# Altium PCB MKIPRIMARY 2L.PcbDoc
Units mm, origin at the board's own origin, x right, y up, seen from the top; angles counter-clockwise.
Board outline 61.2 x 34.4 mm, 4 copper layers (Top Layer, Int1, Int2, Bottom Layer), stack 1.586 mm thick; 137 components, 1 nets, 284 pads, 96 vias.
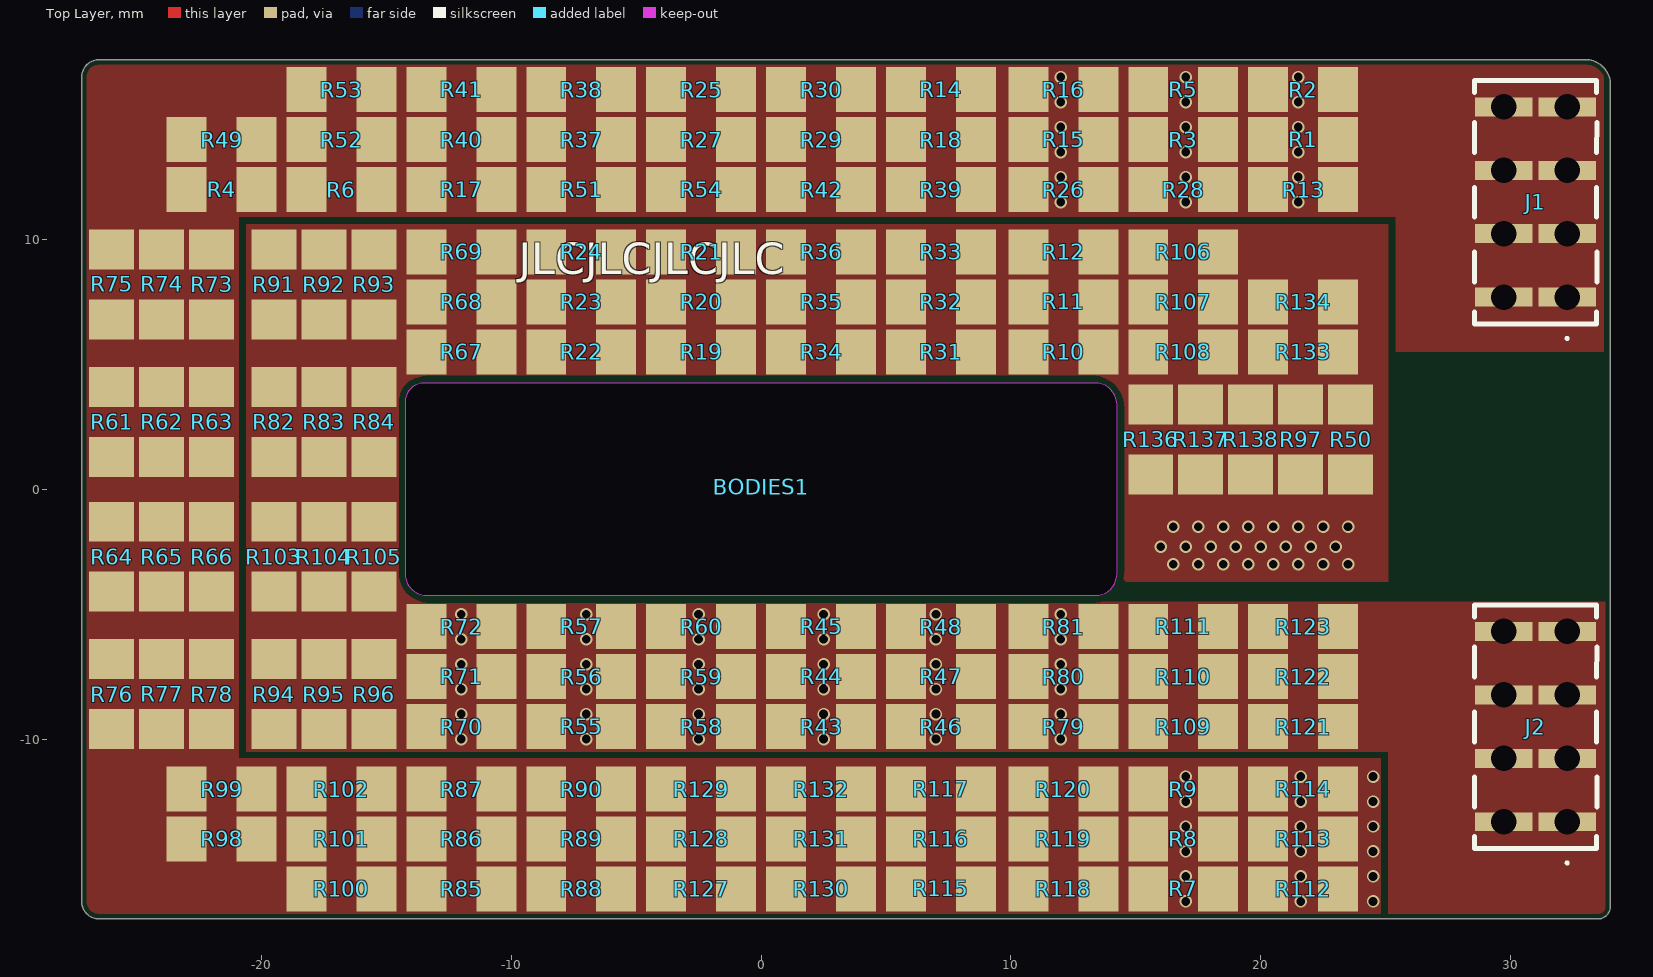
[diagram p0: Top Layer view]
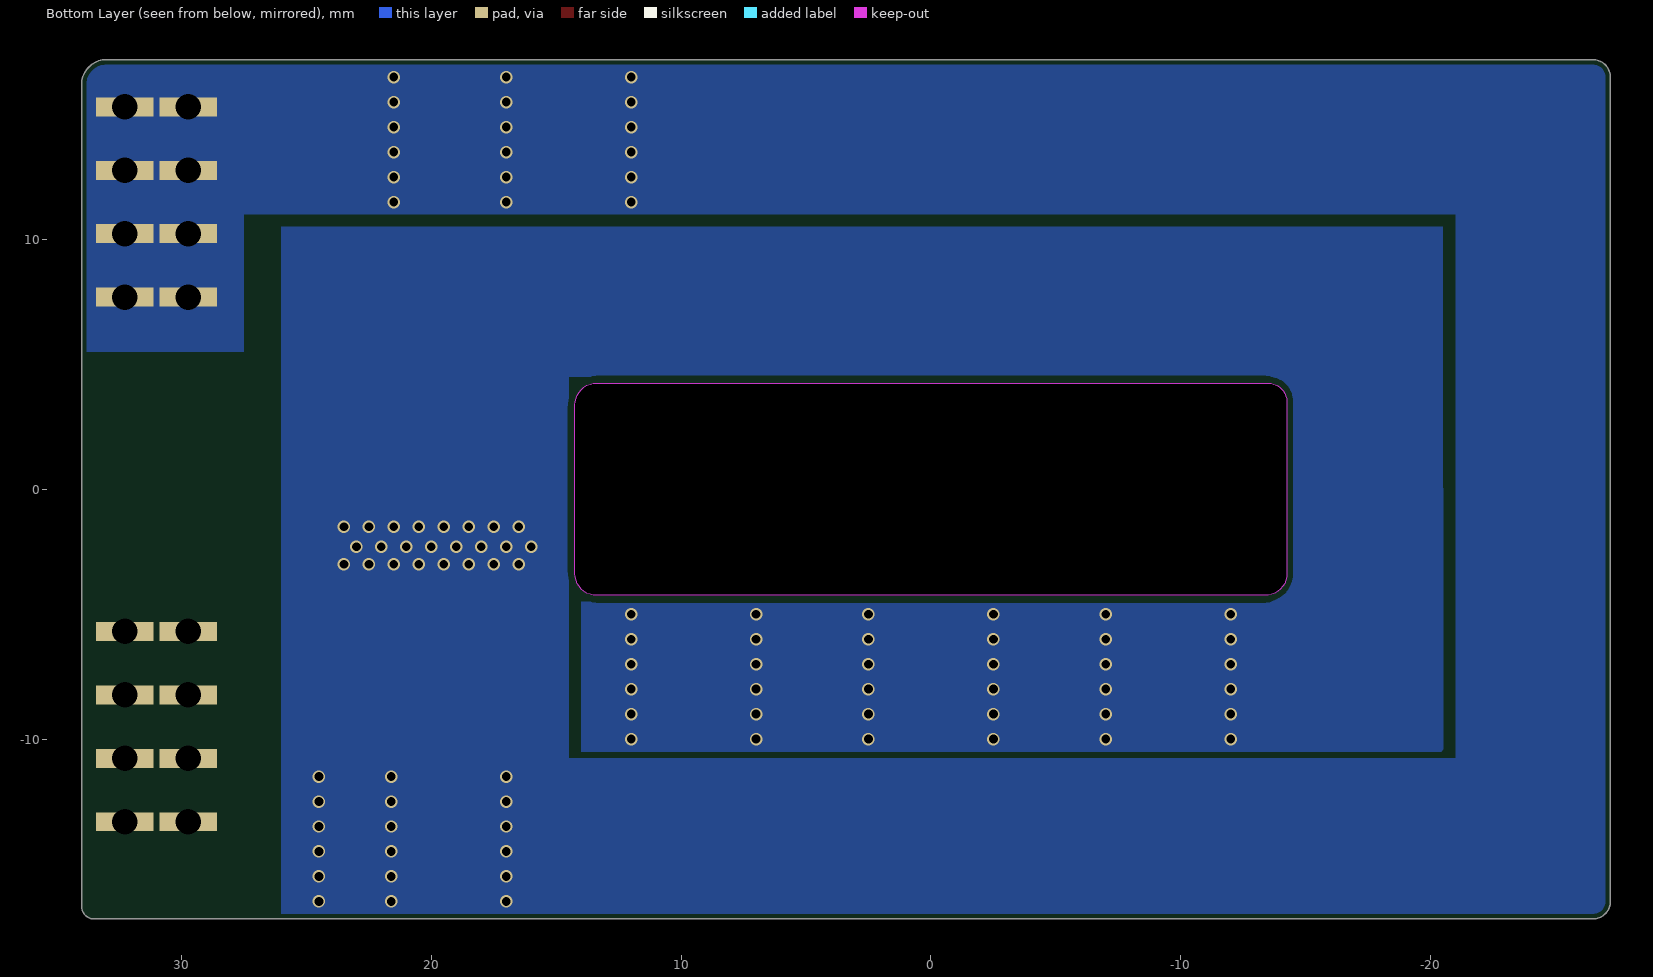
[diagram p1: Bottom Layer view, seen from below]

## Layer stack, top to bottom
Top Solder: solder mask 0.0254, SM-001, Dk 4
Top Layer: signal copper 0.035
Dielectric 2: prepreg 0.2104, PP-017, Dk 4.3
Int1: signal copper 0.0152
Dielectric 3: core 1.065, Core-039, Dk 4.8
Int2: signal copper 0.0152
Dielectric 4: prepreg 0.2104, PP-017, Dk 4.3
Bottom Layer: signal copper 0.035
Bottom Solder: solder mask 0.0254, SM-001, Dk 4

## Board outline
-27.2,-16.5 -27.2,16.5 cw(c-26.5,16.5) -26.5,17.2 33,17.2 cw(c33,16.2) 34,16.2 34,-16.7 cw(c33.5,-16.7) 33.5,-17.2 -26.5,-17.2 cw(c-26.5,-16.5)
cut-out: 13.375,-4.25 ccw(c13.375,-3.375) 14.25,-3.375 14.25,3.375 ccw(c13.375,3.375) 13.375,4.25 -13.5,4.25 ccw(c-13.5,3.5) -14.25,3.5 -14.25,-3.375 ccw(c-13.375,-3.375) -13.375,-4.25

## Design rules (kind name [scope] priority, off if disabled: settings)
BoardOutlineClearance [All] p1: gap=0.2 ignorepadtopadclearanceinfootprint=FALSE
Clearance [All] p1: gap=0.2 ignorepadtopadclearanceinfootprint=FALSE except(0.09: Arc-Arc Arc-Track Track-Track; 0.1: SMDPad-Via; 0.127: SMDPad-SMDPad SMDPad-THPad; 0.15: Arc-Text Track-Text SMDPad-Text THPad-Text Via-Text Fill-Text Poly-Text Region-Text; 0.25: THPad-Via THPad-Fill THPad-Poly THPad-Region Fill-Fill Fill-Poly Fill-Region Fill-Hole Poly-Poly Poly-Region Poly-Hole Region-Region Region-Hole; 0.254: Arc-Via Arc-Hole Track-Via Track-Hole Via-Via; 0.5: THPad-THPad)
HoleSize [All] p1: absolutevalues=TRUE maxlimit=400 minlimit=0.15 maxpercent=80.000 minpercent=20.000
HoleToHoleClearance [All] p1: gap=0.5 allowstackedmicrovias=TRUE
MinimumAnnularRing MinimumAnnularRing_1 [All] p1: minimumring=0.254
MinimumSolderMaskSliver [All] p1: minsoldermaskwidth=0.05
PlaneClearance [All] p1: clearance=0.35
PolygonConnect POW [InNetClass('POW')] p1: connectstyle=Direct reliefconductorwidth=0.254 reliefentries=4 polygonreliefangle="90 Angle" airgapwidth=0.254
PolygonConnect Polygon_GND [InNet('GND')] p2: connectstyle=Direct reliefconductorwidth=0.5 reliefentries=4 polygonreliefangle="45 Angle" airgapwidth=0.25
PolygonConnect "General Polygons" [All] p3: connectstyle=Direct reliefconductorwidth=0.3 reliefentries=4 polygonreliefangle="90 Angle" airgapwidth=0.25
RoutingVias [All] p1: holewidth=0.45 width=0.4 viastyle="Through Hole" minholewidth=0.15 minwidth=0.25 maxholewidth=6.3 maxwidth=2
SilkToSolderMaskClearance SilkToSolderMaskClearance_1 [All] p1: minsilkscreentomaskgap=0.05 clearancetoexposedcopper=TRUE
SolderMaskExpansion SolderMaskExpansion_1 [All] p1: expansion=0.102
UnRoutedNet [All] p1: checkbadconnections=TRUE
Width [All] p1: maxlimit=1 minlimit=0.09 preferedwidth=0.4 minimp=50.000000 maximp=50.000000 favimp=50.000000
24 further rules are at their usual default settings.

## Components (designator, comment, footprint, x,y, rotation, side; value= is the part's Value field where it differs from the comment)
BODIES1 "ELP43 I CORE" B66291G0000X187 0,0.1 r90 top
J1 "5-146254-4" 51462544 31,11.5 r90 top
J2 "5-146254-4" 51462544 31,-9.5 r90 top
R1 "1206W4F0000T5E" R_1206 21.7,14 r180 top value=0R
R2 "1206W4F0000T5E" R_1206 21.7,16 r180 top value=0R
R3 "1206W4F0000T5E" R_1206 16.9,14 r180 top value=0R
R4 "1206W4F0000T5E" R_1206 -21.6,12 r180 top value=0R
R5 "1206W4F0000T5E" R_1206 16.9,16 r180 top value=0R
R6 "1206W4F0000T5E" R_1206 -16.8,12 r180 top value=0R
R7 "1206W4F0000T5E" R_1206 16.9,-16 r180 top value=0R
R8 "1206W4F0000T5E" R_1206 16.9,-14 r180 top value=0R
R9 "1206W4F0000T5E" R_1206 16.9,-12 r180 top value=0R
R10 "1206W4F0000T5E" R_1206 12.1,5.5 r180 top value=0R
R11 "1206W4F0000T5E" R_1206 12.1,7.5 r180 top value=0R
R12 "1206W4F0000T5E" R_1206 12.1,9.5 r180 top value=0R
R13 "1206W4F0000T5E" R_1206 21.7,12 r180 top value=0R
R14 "1206W4F0000T5E" R_1206 7.2,16 r180 top value=0R
R15 "1206W4F0000T5E" R_1206 12.1,14 r180 top value=0R
R16 "1206W4F0000T5E" R_1206 12.1,16 r180 top value=0R
R17 "1206W4F0000T5E" R_1206 -12,12 r180 top value=0R
R18 "1206W4F0000T5E" R_1206 7.2,14 r180 top value=0R
R19 "1206W4F0000T5E" R_1206 -2.4,5.5 r180 top value=0R
R20 "1206W4F0000T5E" R_1206 -2.4,7.5 r180 top value=0R
R21 "1206W4F0000T5E" R_1206 -2.4,9.5 r180 top value=0R
R22 "1206W4F0000T5E" R_1206 -7.2,5.5 r180 top value=0R
R23 "1206W4F0000T5E" R_1206 -7.2,7.5 r180 top value=0R
R24 "1206W4F0000T5E" R_1206 -7.2,9.5 r180 top value=0R
R25 "1206W4F0000T5E" R_1206 -2.4,16 r180 top value=0R
R26 "1206W4F0000T5E" R_1206 12.1,12 r180 top value=0R
R27 "1206W4F0000T5E" R_1206 -2.4,14 r180 top value=0R
R28 "1206W4F0000T5E" R_1206 16.9,12 r180 top value=0R
R29 "1206W4F0000T5E" R_1206 2.4,14 r180 top value=0R
R30 "1206W4F0000T5E" R_1206 2.4,16 r180 top value=0R
R31 "1206W4F0000T5E" R_1206 7.2,5.5 r180 top value=0R
R32 "1206W4F0000T5E" R_1206 7.2,7.5 r180 top value=0R
R33 "1206W4F0000T5E" R_1206 7.2,9.5 r180 top value=0R
R34 "1206W4F0000T5E" R_1206 2.4,5.5 r180 top value=0R
R35 "1206W4F0000T5E" R_1206 2.4,7.5 r180 top value=0R
R36 "1206W4F0000T5E" R_1206 2.4,9.5 r180 top value=0R
R37 "1206W4F0000T5E" R_1206 -7.2,14 r180 top value=0R
R38 "1206W4F0000T5E" R_1206 -7.2,16 r180 top value=0R
R39 "1206W4F0000T5E" R_1206 7.2,12 r180 top value=0R
R40 "1206W4F0000T5E" R_1206 -12,14 r180 top value=0R
R41 "1206W4F0000T5E" R_1206 -12,16 r180 top value=0R
R42 "1206W4F0000T5E" R_1206 2.4,12 r180 top value=0R
R43 "1206W4F0000T5E" R_1206 2.4,-9.5 r180 top value=0R
R44 "1206W4F0000T5E" R_1206 2.4,-7.5 r180 top value=0R
R45 "1206W4F0000T5E" R_1206 2.4,-5.5 r180 top value=0R
R46 "1206W4F0000T5E" R_1206 7.2,-9.5 r180 top value=0R
R47 "1206W4F0000T5E" R_1206 7.2,-7.5 r180 top value=0R
R48 "1206W4F0000T5E" R_1206 7.2,-5.5 r180 top value=0R
R49 "1206W4F0000T5E" R_1206 -21.6,14 r180 top value=0R
R50 "1206W4F0000T5E" R_1206 23.6,2 r270 top value=0R
R51 "1206W4F0000T5E" R_1206 -7.2,12 r180 top value=0R
R52 "1206W4F0000T5E" R_1206 -16.8,14 r180 top value=0R
R53 "1206W4F0000T5E" R_1206 -16.8,16 r180 top value=0R
R54 "1206W4F0000T5E" R_1206 -2.4,12 r180 top value=0R
R55 "1206W4F0000T5E" R_1206 -7.2,-9.5 r180 top value=0R
R56 "1206W4F0000T5E" R_1206 -7.2,-7.5 r180 top value=0R
R57 "1206W4F0000T5E" R_1206 -7.2,-5.5 r180 top value=0R
R58 "1206W4F0000T5E" R_1206 -2.4,-9.5 r180 top value=0R
R59 "1206W4F0000T5E" R_1206 -2.4,-7.5 r180 top value=0R
R60 "1206W4F0000T5E" R_1206 -2.4,-5.5 r180 top value=0R
R61 "1206W4F0000T5E" R_1206 -26,2.7 r90 top value=0R
R62 "1206W4F0000T5E" R_1206 -24,2.7 r90 top value=0R
R63 "1206W4F0000T5E" R_1206 -22,2.7 r90 top value=0R
R64 "1206W4F0000T5E" R_1206 -26,-2.7 r90 top value=0R
R65 "1206W4F0000T5E" R_1206 -24,-2.7 r90 top value=0R
R66 "1206W4F0000T5E" R_1206 -22,-2.7 r90 top value=0R
R67 "1206W4F0000T5E" R_1206 -12,5.5 r180 top value=0R
R68 "1206W4F0000T5E" R_1206 -12,7.5 r180 top value=0R
R69 "1206W4F0000T5E" R_1206 -12,9.5 r180 top value=0R
R70 "1206W4F0000T5E" R_1206 -12,-9.5 r180 top value=0R
R71 "1206W4F0000T5E" R_1206 -12,-7.5 r180 top value=0R
R72 "1206W4F0000T5E" R_1206 -12,-5.5 r180 top value=0R
R73 "1206W4F0000T5E" R_1206 -22,8.2 r90 top value=0R
R74 "1206W4F0000T5E" R_1206 -24,8.2 r90 top value=0R
R75 "1206W4F0000T5E" R_1206 -26,8.2 r90 top value=0R
R76 "1206W4F0000T5E" R_1206 -26,-8.2 r90 top value=0R
R77 "1206W4F0000T5E" R_1206 -24,-8.2 r90 top value=0R
R78 "1206W4F0000T5E" R_1206 -22,-8.2 r90 top value=0R
R79 "1206W4F0000T5E" R_1206 12.1,-9.5 r180 top value=0R
R80 "1206W4F0000T5E" R_1206 12.1,-7.5 r180 top value=0R
R81 "1206W4F0000T5E" R_1206 12.1,-5.5 r180 top value=0R
R82 "1206W4F0000T5E" R_1206 -19.5,2.7 r90 top value=0R
R83 "1206W4F0000T5E" R_1206 -17.5,2.7 r90 top value=0R
R84 "1206W4F0000T5E" R_1206 -15.5,2.7 r90 top value=0R
R85 "1206W4F0000T5E" R_1206 -12,-16 r180 top value=0R
R86 "1206W4F0000T5E" R_1206 -12,-14 r180 top value=0R
R87 "1206W4F0000T5E" R_1206 -12,-12 r180 top value=0R
R88 "1206W4F0000T5E" R_1206 -7.2,-16 r180 top value=0R
R89 "1206W4F0000T5E" R_1206 -7.2,-14 r180 top value=0R
R90 "1206W4F0000T5E" R_1206 -7.2,-12 r180 top value=0R
R91 "1206W4F0000T5E" R_1206 -19.5,8.2 r90 top value=0R
R92 "1206W4F0000T5E" R_1206 -17.5,8.2 r90 top value=0R
R93 "1206W4F0000T5E" R_1206 -15.5,8.2 r90 top value=0R
R94 "1206W4F0000T5E" R_1206 -19.5,-8.2 r90 top value=0R
R95 "1206W4F0000T5E" R_1206 -17.5,-8.2 r90 top value=0R
R96 "1206W4F0000T5E" R_1206 -15.5,-8.2 r90 top value=0R
R97 "1206W4F0000T5E" R_1206 21.6,2 r270 top value=0R
R98 "1206W4F0000T5E" R_1206 -21.6,-14 r180 top value=0R
R99 "1206W4F0000T5E" R_1206 -21.6,-12 r180 top value=0R
R100 "1206W4F0000T5E" R_1206 -16.8,-16 r180 top value=0R
R101 "1206W4F0000T5E" R_1206 -16.8,-14 r180 top value=0R
R102 "1206W4F0000T5E" R_1206 -16.8,-12 r180 top value=0R
R103 "1206W4F0000T5E" R_1206 -19.5,-2.7 r90 top value=0R
R104 "1206W4F0000T5E" R_1206 -17.5,-2.7 r90 top value=0R
R105 "1206W4F0000T5E" R_1206 -15.5,-2.7 r90 top value=0R
R106 "1206W4F0000T5E" R_1206 16.9,9.5 r0 top value=0R
R107 "1206W4F0000T5E" R_1206 16.9,7.5 r0 top value=0R
R108 "1206W4F0000T5E" R_1206 16.9,5.5 r0 top value=0R
R109 "1206W4F0000T5E" R_1206 16.9,-9.5 r180 top value=0R
R110 "1206W4F0000T5E" R_1206 16.9,-7.5 r180 top value=0R
R111 "1206W4F0000T5E" R_1206 16.9,-5.5 r180 top value=0R
R112 "1206W4F0000T5E" R_1206 21.7,-16 r180 top value=0R
R113 "1206W4F0000T5E" R_1206 21.7,-14 r180 top value=0R
R114 "1206W4F0000T5E" R_1206 21.7,-12 r180 top value=0R
R115 "1206W4F0000T5E" R_1206 7.2,-16 r180 top value=0R
R116 "1206W4F0000T5E" R_1206 7.2,-14 r180 top value=0R
R117 "1206W4F0000T5E" R_1206 7.2,-12 r180 top value=0R
R118 "1206W4F0000T5E" R_1206 12.1,-16 r180 top value=0R
R119 "1206W4F0000T5E" R_1206 12.1,-14 r180 top value=0R
R120 "1206W4F0000T5E" R_1206 12.1,-12 r180 top value=0R
R121 "1206W4F0000T5E" R_1206 21.7,-9.5 r180 top value=0R
R122 "1206W4F0000T5E" R_1206 21.7,-7.5 r180 top value=0R
R123 "1206W4F0000T5E" R_1206 21.7,-5.5 r180 top value=0R
R127 "1206W4F0000T5E" R_1206 -2.4,-16 r180 top value=0R
R128 "1206W4F0000T5E" R_1206 -2.4,-14 r180 top value=0R
R129 "1206W4F0000T5E" R_1206 -2.4,-12 r180 top value=0R
R130 "1206W4F0000T5E" R_1206 2.4,-16 r180 top value=0R
R131 "1206W4F0000T5E" R_1206 2.4,-14 r180 top value=0R
R132 "1206W4F0000T5E" R_1206 2.4,-12 r180 top value=0R
R133 "1206W4F0000T5E" R_1206 21.7,5.5 r180 top value=0R
R134 "1206W4F0000T5E" R_1206 21.7,7.5 r180 top value=0R
R136 "1206W4F0000T5E" R_1206 15.6,2 r90 top value=0R
R137 "1206W4F0000T5E" R_1206 17.6,2 r90 top value=0R
R138 "1206W4F0000T5E" R_1206 19.6,2 r90 top value=0R

## Footprints (in the part's own frame and the unit in brackets; to place one, negate y for a bottom-side part, rotate by r counter-clockwise, add the part's x,y. Pads: shape width x height; smd on the part's side, far side on the other; paste and mask are expansions set on the pad)
51462544 [mm]
  rect 0.76x2.29 hole 1.02: 1(-3.81,-1.27) 2(-3.81,1.27) 3(-1.27,-1.27) 4(-1.27,1.27) 5(1.27,-1.27) 6(1.27,1.27) 7(3.81,-1.27) 8(3.81,1.27)
  silkscreen extent -5.51,-2.47 4.87,2.44, body extent -4.88,-2.45 4.88,2.43, height 8.2
B66291G0000X187 [mm] "Bare N87 ELP43 E Core"
  body extent -21.6,-13.95 21.6,13.95, height 9.5
R_1206 [mm] "Body 3.2 x 1.6 mm (LxW typ)"
  rect 1.6x1.8 smd: 1(-1.4,0) 2(1.4,0)
  body extent -1.91,-0.76 1.91,0.76, height 1

## Part data
BODIES1: "BODIES - ELP43 3D BODY CORE, I CORE"
J1 J2: "Connector", Manufacturer_Name="TE Connectivity", Mouser Part Number=571-5-146254-4, Datasheet Link=https://www.te.com/commerce/DocumentDelivery/DDEController?Action=srchrtrv&DocNm=1307819_AMPMODU&DocType=Data+Sheet&DocLang=English&PartCntxt=5-146254-4&DocFormat=pdf, Height=8.21mm, Manufacturer_Part_Number=5-146254-4, Mouser Price/Stock=https://www.mouser.co.uk/ProductDetail/TE-Connectivity/5-146254-4?qs=bwpFY26eRVegfj1X1pwXFA%3D%3D
R1 R2 R3 R4 R5 R6 R7 R8 R9 R10 R11 R12 R13 R14 R15 R16 R17 R18 R19 R20 R21 R22 R23 R24 R25 R26 R27 R28 R29 R30 R31 R32 R33 R34 R35 R36 R37 R38 R39 R40 R41 R42 R43 R44 R45 R46 R47 R48 R49 R50 R51 R52 R53 R54 R55 R56 R57 R58 R59 R60 R61 R62 R63 R64 R65 R66 R67 R68 R69 R70 R71 R72 R73 R74 R75 R76 R77 R78 R79 R80 R81 R82 R83 R84 R85 R86 R87 R88 R89 R90 R91 R92 R93 R94 R95 R96 R97 R98 R99 R100 R101 R102 R103 R104 R105 R106 R107 R108 R109 R110 R111 R112 R113 R114 R115 R116 R117 R118 R119 R120 R121 R122 R123 R127 R128 R129 R130 R131 R132 R133 R134 R136 R137 R138: "R - RESISTOR - SMD - 0R - 1% - 1206", JLC Availability=Basic, LCSC Part #=C17888

## Via types
v1: diameter 0.5, hole 0.35, Top Layer to Bottom Layer, tented both sides, 96 vias

## Nets (pads, with @x,y where several pads share a name; then routed paths per layer and width w, separated by ;. In a path a pad name is that pad's centre, name@x,y a point inside that pad or via, vN(x,y) a via of type N, cw(c..) or ccw(c..) an arc to the next point about the centre after c; other vN are vias at no path point)
primary: J1.1 J1.2 J1.3 J1.4 J1.5 J1.6 J1.7 J1.8 J2.1 J2.2 J2.3 J2.4 J2.5 J2.6 J2.7 J2.8 R1.1 R1.2 R2.1 R2.2 R3.1 R3.2 R4.1 R4.2 R5.1 R5.2 R6.1 R6.2 R7.1 R7.2 R8.1 R8.2 R9.1 R9.2 R10.1 R10.2 R11.1 R11.2 R12.1 R12.2 R13.1 R13.2 R14.1 R14.2 R15.1 R15.2 R16.1 R16.2 R17.1 R17.2 R18.1 R18.2 R19.1 R19.2 R20.1 R20.2 R21.1 R21.2 R22.1 R22.2 R23.1 R23.2 R24.1 R24.2 R25.1 R25.2 R26.1 R26.2 R27.1 R27.2 R28.1 R28.2 R29.1 R29.2 R30.1 R30.2 R31.1 R31.2 R32.1 R32.2 R33.1 R33.2 R34.1 R34.2 R35.1 R35.2 R36.1 R36.2 R37.1 R37.2 R38.1 R38.2 R39.1 R39.2 R40.1 R40.2 R41.1 R41.2 R42.1 R42.2 R43.1 R43.2 R44.1 R44.2 R45.1 R45.2 R46.1 R46.2 R47.1 R47.2 R48.1 R48.2 R49.1 R49.2 R50.1 R50.2 R51.1 R51.2 R52.1 R52.2 R53.1 R53.2 R54.1 R54.2 R55.1 R55.2 R56.1 R56.2 R57.1 R57.2 R58.1 R58.2 R59.1 R59.2 R60.1 R60.2 R61.1 R61.2 R62.1 R62.2 R63.1 R63.2 R64.1 R64.2 R65.1 R65.2 R66.1 R66.2 R67.1 R67.2 R68.1 R68.2 R69.1 R69.2 R70.1 R70.2 R71.1 R71.2 R72.1 R72.2 R73.1 R73.2 R74.1 R74.2 R75.1 R75.2 R76.1 R76.2 R77.1 R77.2 R78.1 R78.2 R79.1 R79.2 R80.1 R80.2 R81.1 R81.2 R82.1 R82.2 R83.1 R83.2 R84.1 R84.2 R85.1 R85.2 R86.1 R86.2 R87.1 R87.2 R88.1 R88.2 R89.1 R89.2 R90.1 R90.2 R91.1 R91.2 R92.1 R92.2 R93.1 R93.2 R94.1 R94.2 R95.1 R95.2 R96.1 R96.2 R97.1 R97.2 R98.1 R98.2 R99.1 R99.2 R100.1 R100.2 R101.1 R101.2 R102.1 R102.2 R103.1 R103.2 R104.1 R104.2 R105.1 R105.2 R106.1 R106.2 R107.1 R107.2 R108.1 R108.2 R109.1 R109.2 R110.1 R110.2 R111.1 R111.2 R112.1 R112.2 R113.1 R113.2 R114.1 R114.2 R115.1 R115.2 R116.1 R116.2 R117.1 R117.2 R118.1 R118.2 R119.1 R119.2 R120.1 R120.2 R121.1 R121.2 R122.1 R122.2 R123.1 R123.2 R127.1 R127.2 R128.1 R128.2 R129.1 R129.2 R130.1 R130.2 R131.1 R131.2 R132.1 R132.2 R133.1 R133.2 R134.1 R134.2 R136.1 R136.2 R137.1 R137.2 R138.1 R138.2
  other v1: 17,-16.5 21.6,-16.5 24.5,-16.5 17,-15.5 21.6,-15.5 24.5,-15.5 17,-14.5 21.6,-14.5 24.5,-14.5 17,-13.5 21.6,-13.5 24.5,-13.5 17,-12.5 21.6,-12.5 24.5,-12.5 17,-11.5 21.6,-11.5 24.5,-11.5 -12,-10 -7,-10 -2.5,-10 2.5,-10 7,-10 12,-10 -12,-9 -7,-9 -2.5,-9 2.5,-9 7,-9 12,-9 -12,-8 -7,-8 -2.5,-8 2.5,-8 7,-8 12,-8 -12,-7 -7,-7 -2.5,-7 2.5,-7 7,-7 12,-7 -12,-6 -7,-6 -2.5,-6 2.5,-6 7,-6 12,-6 -12,-5 -7,-5 -2.5,-5 2.5,-5 7,-5 12,-5 16.5,-3 17.5,-3 18.5,-3 19.5,-3 20.5,-3 21.5,-3 22.5,-3 23.5,-3 16,-2.3 17,-2.3 18,-2.3 19,-2.3 20,-2.3 21,-2.3 22,-2.3 23,-2.3 16.5,-1.5 17.5,-1.5 18.5,-1.5 19.5,-1.5 20.5,-1.5 21.5,-1.5 22.5,-1.5 23.5,-1.5 12,11.5 17,11.5 21.5,11.5 12,12.5 17,12.5 21.5,12.5 12,13.5 17,13.5 21.5,13.5 12,14.5 17,14.5 21.5,14.5 12,15.5 17,15.5 21.5,15.5 12,16.5 17,16.5 21.5,16.5

## Polygon pours and split planes (outlines as drawn)
primary on Top Layer "PRIMARY_L01_P008" (solid, pour order 8): -20.612,-10.5 25.1,-10.5 25.1,-4.5 13.4,-4.5 13.4,-3.7 25.1,-3.7 25.1,10.6 -20.612,10.6
primary on Top Layer "PRIMARY_L01_P008" (solid, pour order 8): 24.8,10.5 -2.318,10.5 24.8,9.894
primary on Top Layer "PRIMARY_L01_P008" (solid, pour order 8): 24.8,-10.496 25.1,-10.495 25.1,-17.103 34.403,-17.103 34,-4.5 24.8,-4.5
primary on Top Layer "PRIMARY_L01_P008" (solid, pour order 8): -20.9,-10.77 24.8,-10.77 24.8,-10.709 24.8,-10.77 24.8,-17.103 -27,-17.103 -27,17 33.744,17 33.744,5.5 25.4,5.5 25.4,10.9 -20.9,10.9
primary on Bottom Layer "PRIMARY_L04_P005" (solid, pour order 5): 34,17 -27,17 -27,-17 26,-17 26,10.5 -20.495,10.5 -20.519,-10.5 14,-10.5 14,-4.5 13,-4.5 -13.5,-4.5 -13.5,4.5 14.5,4.5 14.5,-10.77 -21,-10.77 -21,11 27.5,11 27.5,5.5 34,5.5

## Silkscreen, mask and mechanical layers (free items; w line width, h text height)
Top Overlay:
  text "JLCJLCJLCJLC" at -9.7,8.6 h1.25
Mechanical 30:
  lines w0.01: -14.25,-3.375 ccw(c-13.375,-3.375) -13.375,-4.25 ; -14.25,-3.375 ccw(c-13.375,-3.375) -13.375,-4.25 ; -14.25,-3.375 -14.25,3.5 ; -14.25,-3.375 -14.25,3.5 ; -14.25,3.5 cw(c-13.5,3.5) -13.5,4.25 ; -14.25,3.5 cw(c-13.5,3.5) -13.5,4.25 ; -13.5,4.25 13.375,4.25 ; -13.5,4.25 13.375,4.25 ; -13.375,-4.25 13.375,-4.25 ; -13.375,-4.25 13.375,-4.25 ; 13.375,-4.25 ccw(c13.375,-3.375) 14.25,-3.375 ; 13.375,-4.25 ccw(c13.375,-3.375) 14.25,-3.375 ; 13.375,4.25 cw(c13.375,3.375) 14.25,3.375 ; 13.375,4.25 cw(c13.375,3.375) 14.25,3.375 ; 14.25,-3.375 14.25,3.375 ; 14.25,-3.375 14.25,3.375 ; -27.2,-16.5 ccw(c-26.5,-16.5) -26.5,-17.2 33.5,-17.2 ccw(c33.5,-16.7) 34,-16.7 34,16.2 ccw(c33,16.2) 33,17.2 -26.5,17.2 ccw(c-26.5,16.5) -27.2,16.5 -27.2,-16.5